# Altium PCB top_blank.PcbDoc
Units mm, origin at the board's own origin, x right, y up, seen from the top; angles counter-clockwise.
Board outline 222.25 x 157.48 mm, 2 copper layers (Top Layer, Bottom Layer); 45 components, 27 nets, 181 pads, 2 vias.
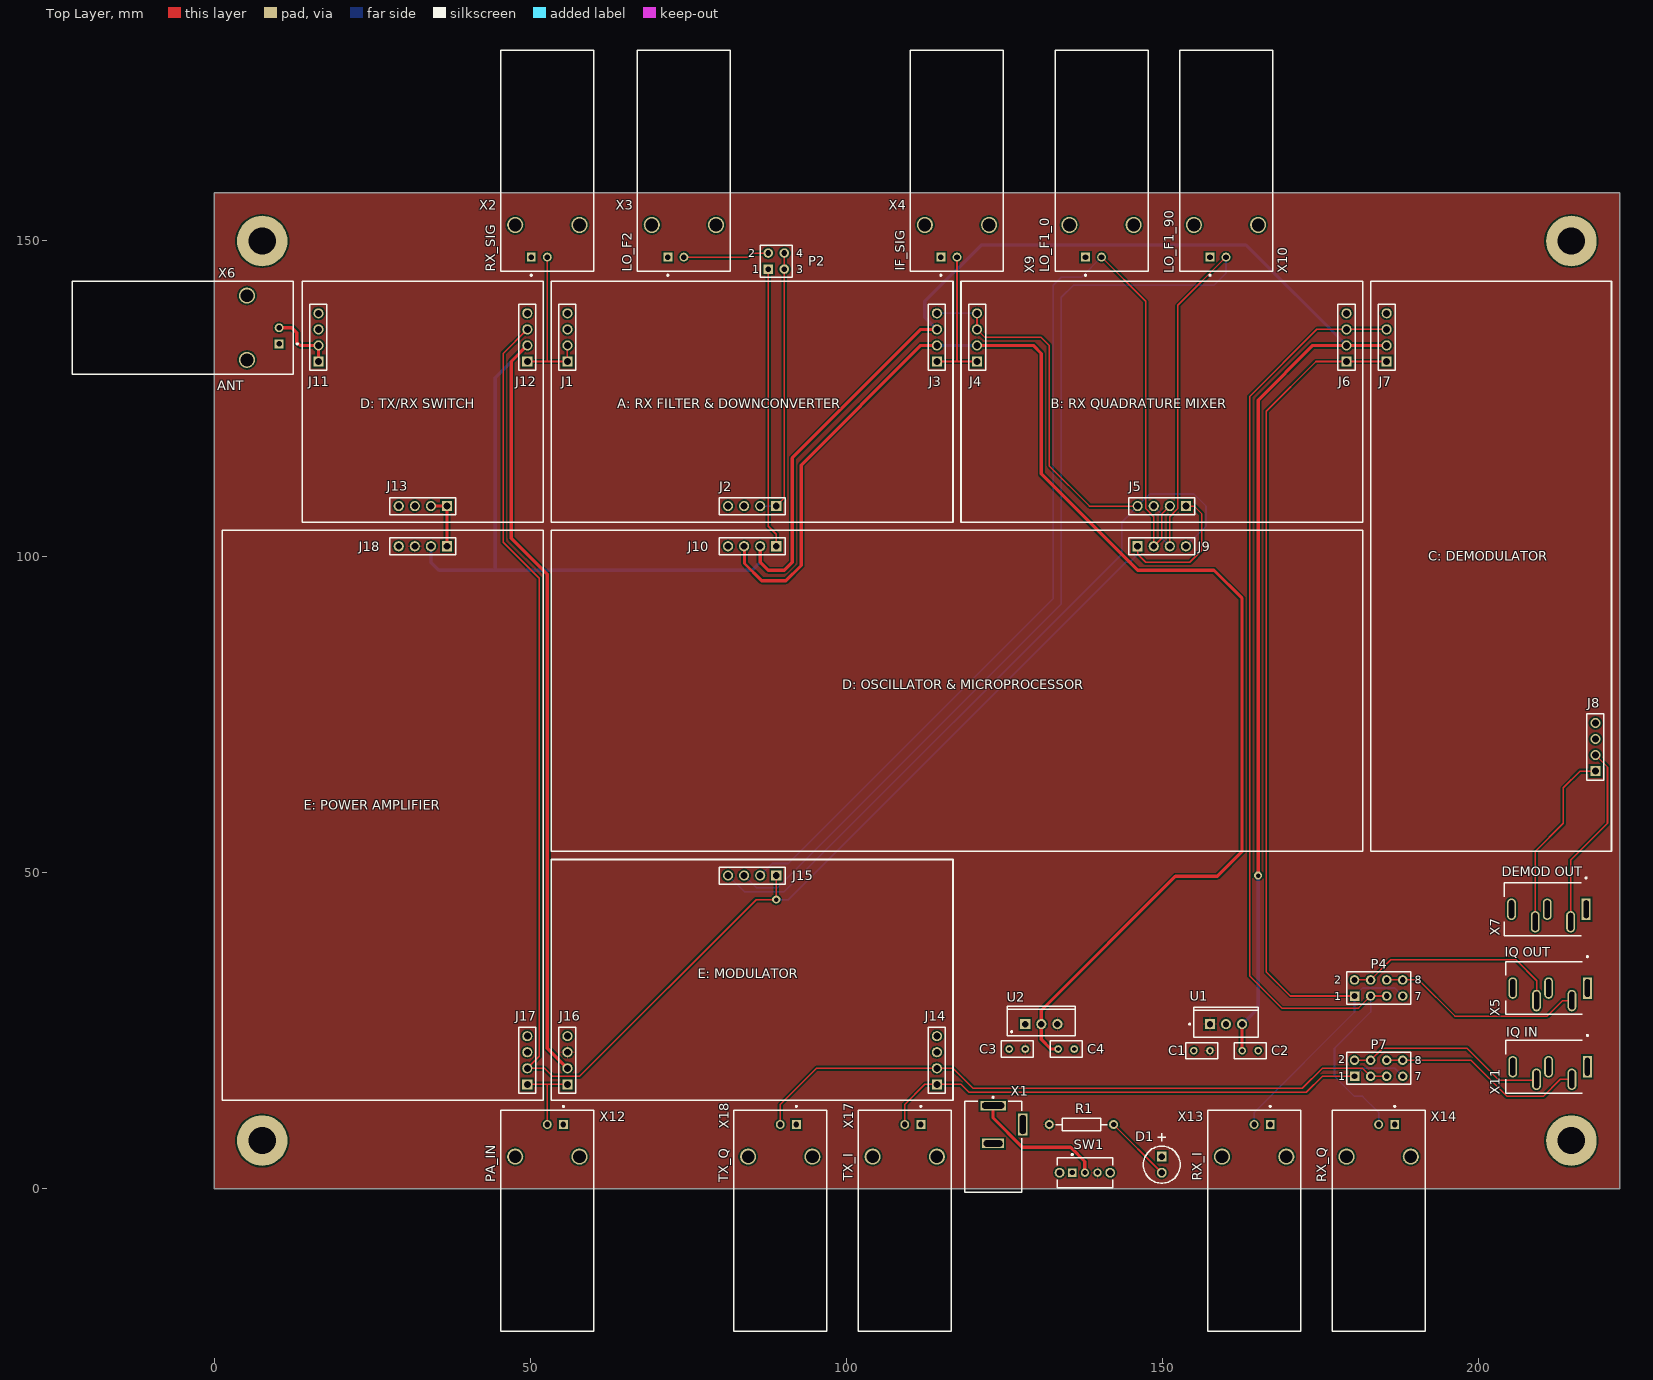
[diagram p0: Top Layer view]
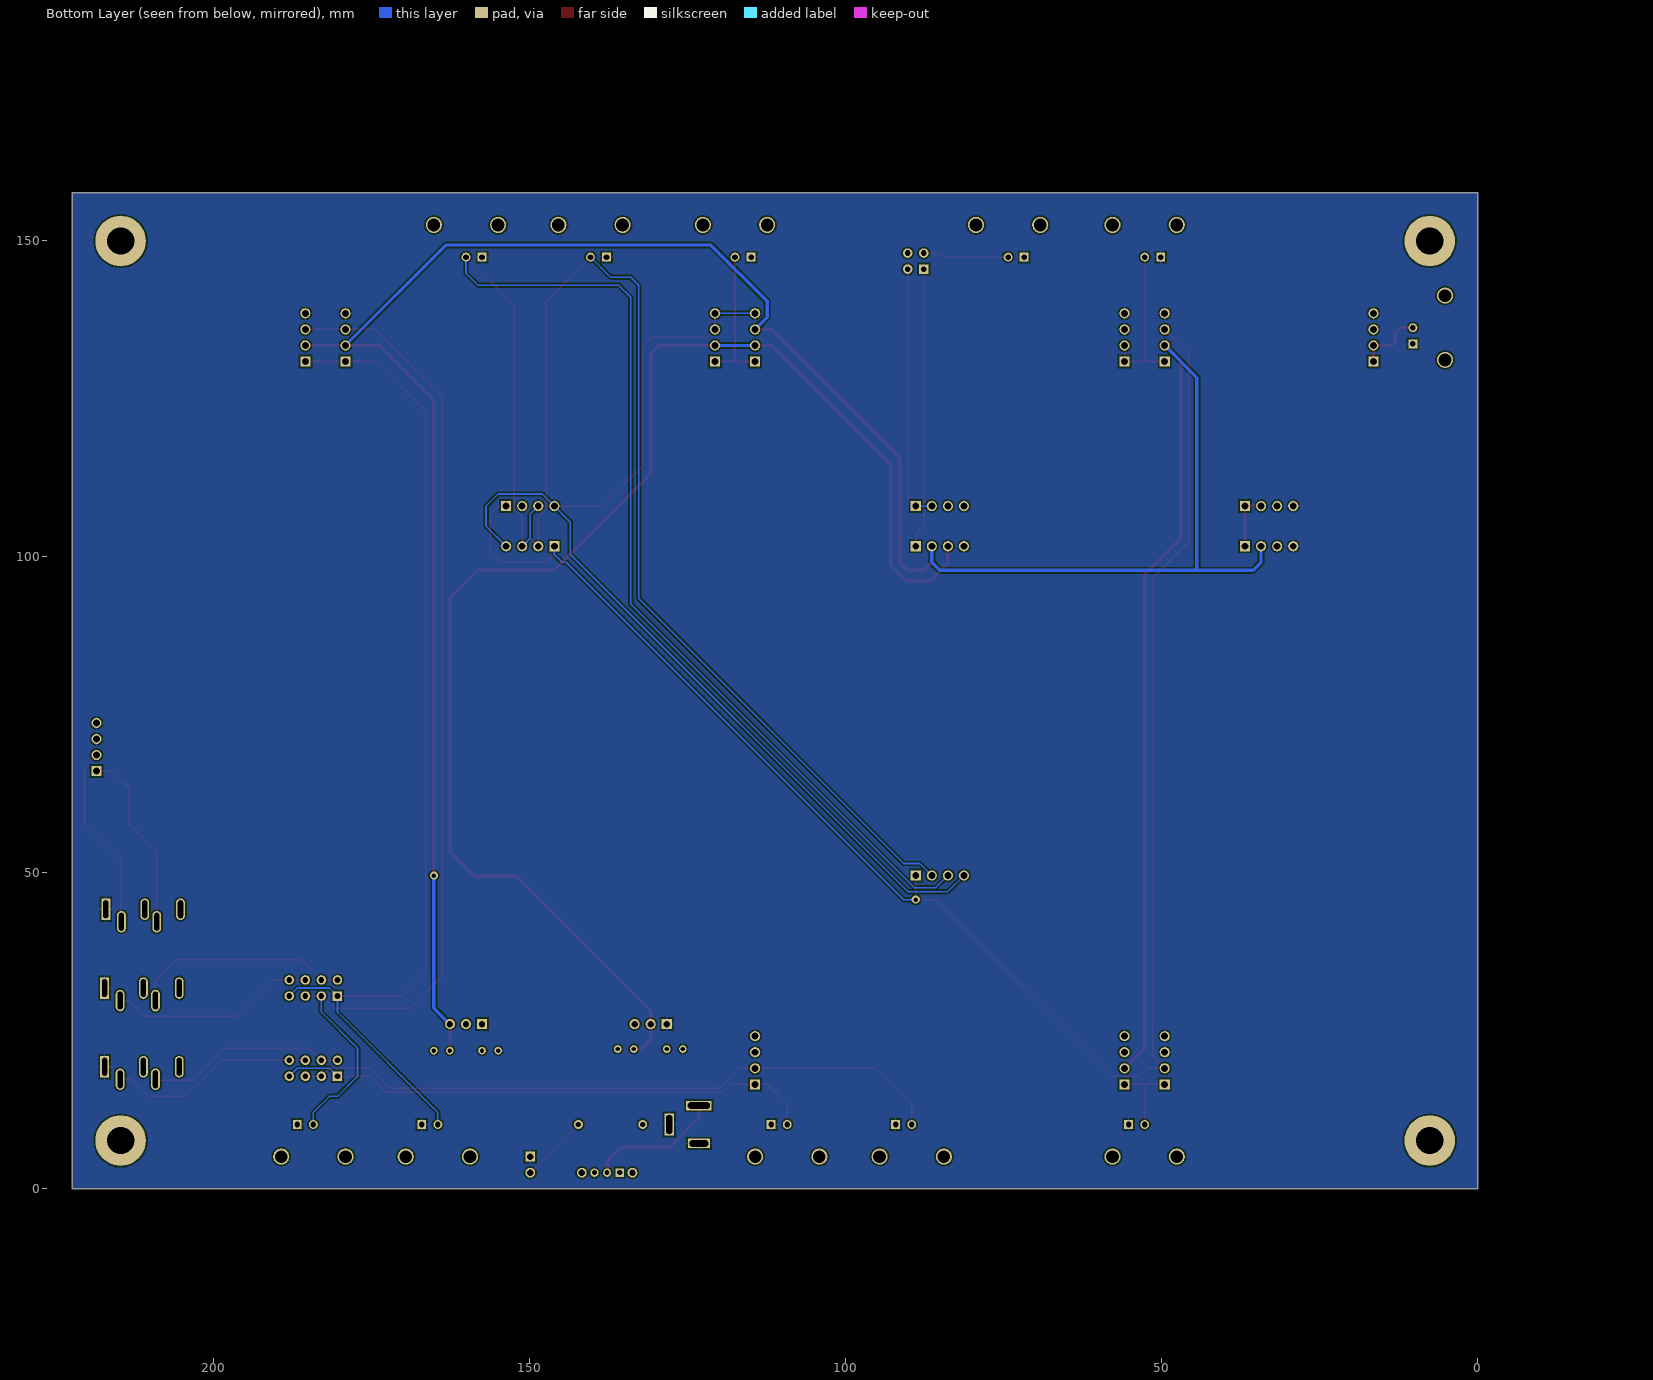
[diagram p1: Bottom Layer view, seen from below]
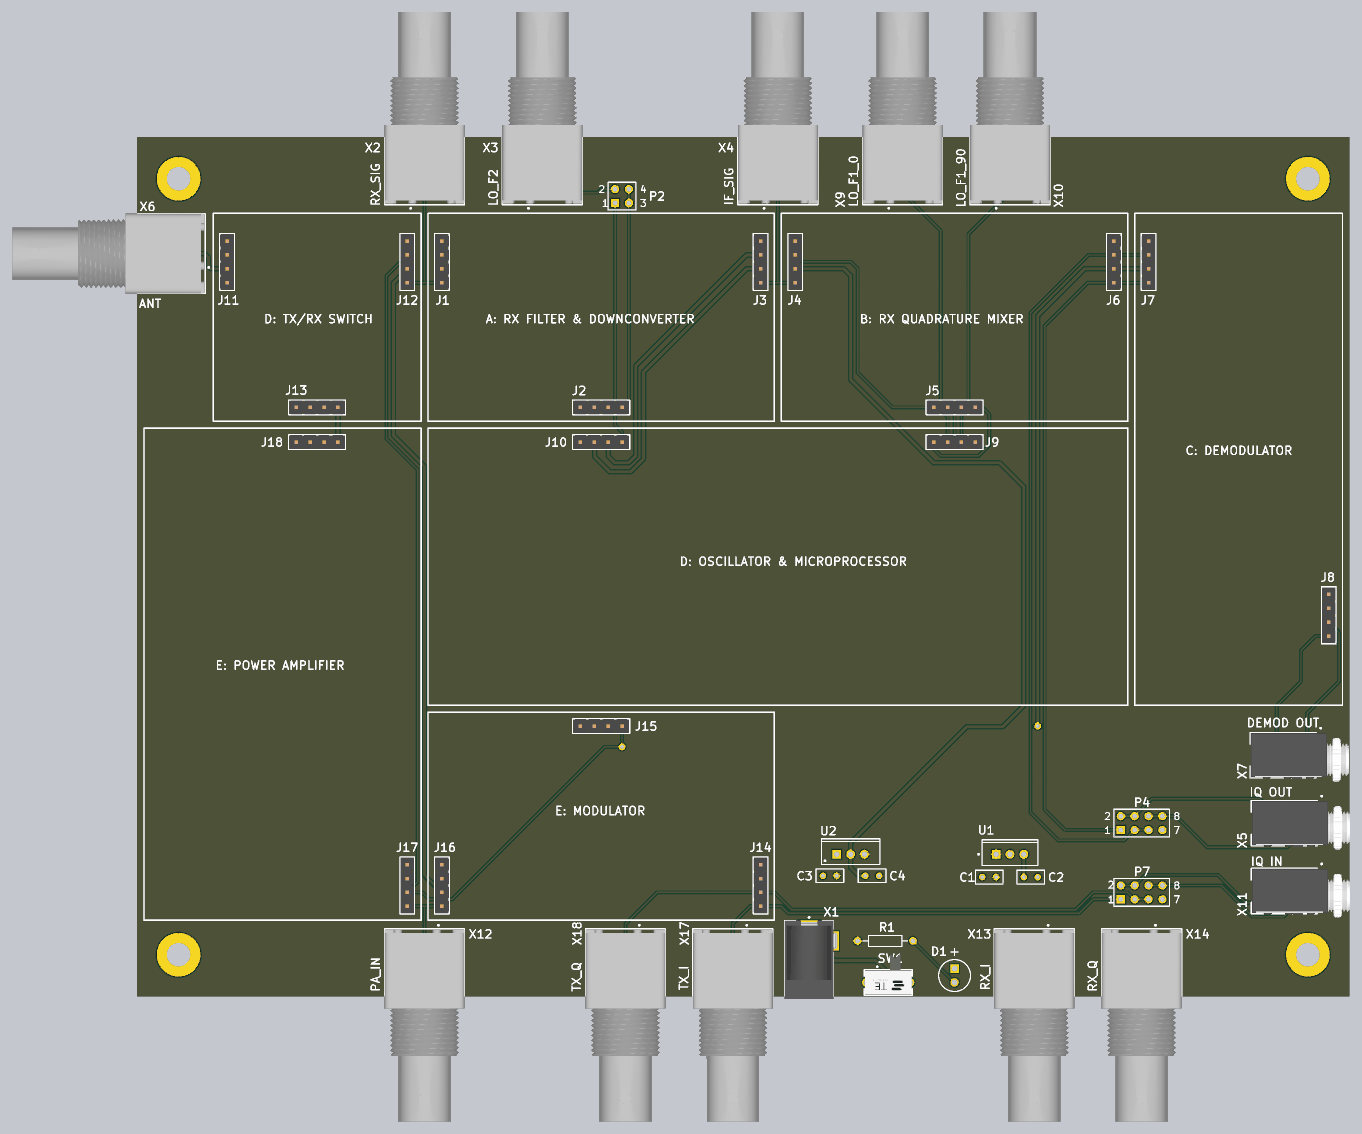
[diagram p2: 3D render of the assembled board from above, using the file's embedded part models]

## Layer stack, top to bottom
Top Solder: solder mask 0.0102, Solder Resist, Dk 3.5
Top Layer: signal copper 0.0356
Dielectric 1: dielectric 0.32, FR-4, Dk 4.8
Bottom Layer: signal copper 0.0356
Bottom Solder: solder mask 0.0102, Solder Resist, Dk 3.5

## Board outline
0,0 222.25,0 222.25,157.48 0,157.48

## Design rules (kind name [scope] priority, off if disabled: settings)
Clearance Clearance_1 [All] p1: gap=0.254 ignorepadtopadclearanceinfootprint=FALSE except(0: Arc-Hole Track-Hole SMDPad-Hole THPad-Hole Via-Hole Fill-Hole Poly-Hole Region-Hole Text-Hole)
Clearance [All] p2: gap=0.254 ignorepadtopadclearanceinfootprint=FALSE except(0: Arc-Hole Track-Hole SMDPad-Hole THPad-Hole Via-Hole Fill-Hole Poly-Hole Region-Hole Text-Hole)
HoleSize [All] p1: absolutevalues=TRUE maxlimit=3.5 minlimit=0.025 maxpercent=80.000 minpercent=20.000
PolygonConnect [All] p1: connectstyle=Relief reliefconductorwidth=0.254 reliefentries=4 polygonreliefangle="90 Angle" airgapwidth=0.254
RoutingVias [All] p1: holewidth=0.711 width=1.27 viastyle="Through Hole" minholewidth=0.711 minwidth=1.27 maxholewidth=0.711 maxwidth=1.27
SilkToSilkClearance [All] p1: silktosilkclearance=0.1
SilkToSolderMaskClearance [IsPad] p1: minsilkscreentomaskgap=0.2 clearancetoexposedcopper=TRUE
SolderMaskExpansion [All] p1: expansion=0.102 istentingtop=FALSE
Width Width_1 [(InNet('+3.3') OR InNet('+5') OR InNet('VCC') OR InNet('ANT') or InNet('PA_OUT') or InNet('VIN'))] p1: maxlimit=0.508 minlimit=0.508 preferedwidth=0.508
Width [All] p2: maxlimit=0.254 minlimit=0.254 preferedwidth=0.254
27 further rules are at their usual default settings.

## Classes and differential pairs
component class U_power_intg: C1 C2 C3 C4 U1 U2
component class U_switch_blank: J11 J12 J13
component class U_rxdown_blank: J1 J2 J3
component class U_qse_blank: J14 J15 J16
component class U_qsd_blank: J4 J5 J6
component class U_pa_blank: J17 J18
component class U_osc_blank: J9 J10
component class U_demod_blank: J7 J8
component class top_blank: D1 P2 P4 P7 R1 SW1 X1 X2 X3 X4 X5 X6 X7 X9 X10 X11 X12 X13 X14 X17 X18

## Components (designator, comment, footprint, x,y, rotation, side; value= is the part's Value field where it differs from the comment)
C1 "Cap" RAD-0.1 156.21,21.844 r180 top value=0.22uF
C2 "Cap" RAD-0.1 163.83,21.844 r0 top value=0.1uF
C3 "Cap Pol1" RAD-0.1 127,22.098 r180 top value=10uF
C4 "Cap" RAD-0.1 134.747,22.098 r0 top value=0.1uF
D1 "HLMP-3301" AVAG-HLMP-3301-2 149.86,5.08 r270 top
J1 "RF" 61300411121 55.88,134.62 r90 top
J2 "LO" 61300411121 85.09,107.95 r180 top
J3 "IF" 61300411121 114.3,134.62 r90 top
J4 "IF" 61300411121 120.65,134.62 r90 top
J5 "LO" 61300411121 149.86,107.95 r180 top
J6 "OUT" 61300411121 179.07,134.62 r90 top
J7 "IN" 61300411121 185.42,134.62 r90 top
J8 "IN" 61300411121 218.44,69.85 r90 top
J9 "LO_F1" 61300411121 149.86,101.6 r0 top
J10 "LO_F2" 61300411121 85.09,101.6 r180 top
J11 "ANT" 61300411121 16.51,134.62 r90 top
J12 "RX" 61300411121 49.53,134.62 r90 top
J13 "TX" 61300411121 33.02,107.95 r180 top
J14 "IN" 61300411121 114.3,20.32 r90 top
J15 "LO" 61300411121 85.09,49.53 r180 top
J16 "PA" 61300411121 55.88,20.32 r90 top
J17 "IN" 61300411121 49.53,20.32 r90 top
J18 "OUT" 61300411121 33.02,101.6 r180 top
P2 "Header 2X2" HDR2X2 87.63,145.415 r0 top
P4 "Header 4X2" HDR2X4 180.34,30.48 r0 top
P7 "Header 4X2" HDR2X4 180.34,17.78 r0 top
R1 "Res1" AXIAL-0.4 137.16,10.16 r180 top value=1k
SW1 "1825232-1" FP-1825232-1-MFG 137.7,2.54 r0 top
U1 "LM7805CT" FAIR-TO-220-3 160.02,26.035 r90 top
U2 "LM1117T-3.3" T03B 130.81,26.035 r0 top
X1 "PJ-002A" CUI-PJ-002A_V 123.19,10.16 r270 top
X2 "RX_SIG" TECO-1-1337543-0_V 52.705,152.4 r0 top
X3 "LO_F2" TECO-1-1337543-0_V 74.295,152.4 r0 top
X4 "IF_SIG" TECO-1-1337543-0_V 117.475,152.4 r0 top
X5 "IQ OUT" FP-35RAPC4BV4-MFG 213.36,31.75 r180 top
X6 "ANT" TECO-1-1337543-0_V 5.207,136.144 r90 top
X7 "DEMOD OUT" FP-35RAPC4BV4-MFG 213.157,44.209 r180 top
X9 "LO_F1_0" TECO-1-1337543-0_V 140.335,152.4 r0 top
X10 "LO_F1_90" TECO-1-1337543-0_V 160.02,152.4 r0 top
X11 "IQ IN" FP-35RAPC4BV4-MFG 213.36,19.304 r180 top
X12 "PA_IN" TECO-1-1337543-0_V 52.705,5.08 r180 top
X13 "RX_I" TECO-1-1337543-0_V 164.465,5.08 r180 top
X14 "RX_Q" TECO-1-1337543-0_V 184.15,5.08 r180 top
X17 "TX_I" TECO-1-1337543-0_V 109.22,5.08 r180 top
X18 "TX_Q" TECO-1-1337543-0_V 89.535,5.08 r180 top

## Footprints (in the part's own frame and the unit in brackets; to place one, negate y for a bottom-side part, rotate by r counter-clockwise, add the part's x,y. Pads: shape width x height; smd on the part's side, far side on the other; paste and mask are expansions set on the pad)
61300411121 [mm] "Pin Header, pitch 2.54 mm, THT, Vertical, single row, 4p"
  rect 1.6x1.6 hole 1.1: 1(-3.81,0)
  round 1.6 hole 1.1: 2(-1.27,0) 3(1.27,0) 4(3.81,0)
  silkscreen extent -5.23,-1.35 5.23,1.35, body extent -5.08,-1.27 5.08,1.27, height 8.57
AVAG-HLMP-3301-2 [mm] "THD, 2-Leads, Body Dia 5.85mm"
  rect 1.55x1.55 hole 1.05: 1(0,0)
  round 1.55 hole 1.05: 2(2.54,0)
  silkscreen extent -3.68,-2.92 4.19,2.92
AXIAL-0.4 [mm] "Axial Device, Thru-Hole; 2 Leads; 0.4 in Pin Spacing"
  round 1.4 hole 0.85: 1(-5.08,0) 2(5.08,0)
  silkscreen extent -4.06,-1.02 4.06,1.02
CUI-PJ-002A_V [mm] "THD, 3-Leads, Body 14.4x9mm, Height 11mm"
  rect 1.5x4 hole 1 slot 3.5 at 90 deg: 1(-3,0)
  rect 1.5x3.5 hole 1 slot 3 at 90 deg: 2(3,0)
  rect 3.5x1.5 hole 1 slot 3 at 0 deg: 3(0,4.7)
  silkscreen extent -4.42,-4.5 10.7,4.5, body extent -3.7,-4.5 10.7,4.9, height 11
FAIR-TO-220-3 [mm] "FM, 3-Leads, Body 10.2x4.7mm, Pitch 2.54mm"
  rect 1.6x1.6 hole 1: 1(0,2.54)
  round 1.6 hole 1: 2(0,0) 3(0,-2.54)
  silkscreen extent -2.04,-5.1 2.66,5.87, body extent -2.04,-5.1 2.66,5.1, height 18.95
FP-35RAPC4BV4-MFG [mm]
  rect 1.4x3.4 hole 2.8 slot 0.8 at 0 deg paste-1000 mask+0: 1(-3.81,0.013)
  rrect100% 1.4x3.4 hole 2.8 slot 0.8 at 0 deg paste-1000 mask+0: 2(-1.346,1.994) 3(2.337,0.013) 4(4.242,1.994) 5(8.001,0.013)
  silkscreen extent -3.93,-5.07 9.12,4.18, body extent -9.22,-4.28 9.22,4.28, height 0.25
FP-1825232-1-MFG [mm]
  rect 1.3x1.3 hole 0.8 paste-1000 mask+0: 1(-2,0)
  round 1.3 hole 0.8 paste-1000 mask+0: 2(0,0) 3(2,0)
  round 1.55 hole 1 paste-1000 mask+0: 4(-4,0) 5(4,0)
  silkscreen extent -4.4,-2.35 4.4,3, body extent -4.87,-5.45 4.87,2.45, height 0.25
HDR2X2 [mm] "Connector; Header; 2x2 Position"
  rect 1.5x1.5 hole 0.9: 1(0,0)
  round 1.5 hole 0.9: 2(0,2.54) 3(2.54,0) 4(2.54,2.54)
  silkscreen extent -1.27,-1.27 3.81,3.81
HDR2X4 [mm] "Connector; Header; 4x2 Position"
  rect 1.5x1.5 hole 0.9: 1(0,0)
  round 1.5 hole 0.9: 2(0,2.54) 3(2.54,0) 4(2.54,2.54) 5(5.08,0) 6(5.08,2.54) 7(7.62,0) 8(7.62,2.54)
  silkscreen extent -1.27,-1.27 8.89,3.81
RAD-0.1 [mm] "Radial Cap, Thru-Hole; 2 Leads; 0.1 in Pin Spacing"
  round 1.2 hole 0.7: 1(-1.27,0) 2(1.27,0)
  silkscreen extent -2.54,-1.27 2.54,1.27
T03B [mm] "TO, Thru-Hole, Vertical, Heatsink Mounted; 3 In-Line Leads; Pitch 2.54 mm"
  rect 1.6x1.6 hole 1: 1(-2.54,0)
  round 1.6 hole 1: 2(0,0) 3(2.54,0)
  silkscreen extent -5.35,-1.85 5.35,2.85, body extent -5.4,-1.9 5.4,2.9, height 19.8
TECO-1-1337543-0_V [mm] "SMD, 2-Leads, Body 34.9x14.7mm, Pitch 2.54mm"
  rect 1.4x1.4 hole 0.89: 1(-2.54,-5.08)
  round 1.4 hole 0.89: 2(0,-5.08)
  round 2.55 hole 2.01: MH1(-5.08,0) MH2(5.08,0)
  silkscreen extent -7.35,-8.07 7.35,27.6, body extent -7.35,-7.1 7.35,28.05, height 15.8

## Part data
C1 C2 C4: "Capacitor", LatestRevisionDate=17-Jul-2002, LatestRevisionNote="Re-released for DXP Platform.", PackageDescription="Radial Cap, Thru-Hole; 2 Leads; 0.3 in Pin Spacing", PackageReference=RAD-0.3, Published=8-Jun-2000, Publisher="Altium Limited"
C3: "Polarized Capacitor (Radial)", LatestRevisionDate=17-Jul-2002, LatestRevisionNote="Re-released for DXP Platform.", PackageDescription="Polarized Capacitor (Radial); 2 Leads", PackageReference=RB7.6-15, Published=8-Jun-2000, Publisher="Altium Limited"
D1: library part CMP-2000-06411-1, "T-1 3/4 (5 mm) Diffused LED Lamp, 1.9 V, -40 to 100 degC, 2-Pin THD, RoHS, Bulk", Emitting color=Red, Forward Current=25mA, Forward Voltage=2.4V, Manufacturer=Avago, Operating Temp Range=-40Cto100C, Operating Temperature Classification=Industrial, Package Description="2-Pin Through Hole LED, Dia 5.85 mm", Package Type=T-13/4, Power Dissipation=85W, Reverse Voltage=5V, Test Current (It)=10mA, Chip Material=GaP, Datasheet URL=http://www.avagotech.com/docs/AV02-1558EN, Datasheet Version=03/2015, DELETED=Compliant, Dominant Wave Length=626nm, High Brightness=No, Lens Dimensions=5.08x5.08x8.3mm, Lens Type=ColoredDiffused, Lum Intensity=5.4mcd, Luminous Intensity=5.4mcd, Main Category=StandardLED, Manufacturer URL=http://www.avagotech.com/, Mounting=ThroughHole, Mounting Technology=ThroughHole, Number of  Elements=1, Package Reference=HLMP-3301, Packaging=TapeandReel, Peak Wavelength=635nm, Pin Count=2, Product Depth (mm)=6.1mm, Product Height (mm)=9.19mm, Product Length (mm)=6.1mm, Rad Hardened=No, Shape Type=Circular, Type=Uni-Color, Viewing Angle=60deg
J1 J2 J3 J4 J5 J6 J7 J8 J9 J10 J11 J12 J13 J14 J15 J16 J17 J18: library part CMP-1502-01064-1, "THT Vertical Pin Header WR-PHD, Pitch 2.54 mm, Single Row, 4 pins", Contact Resistance=20mOhm, Manufacturer="Wurth Elektronik", Operating Temperature=-40to105degC, Package Reference=61300411121, Rated Current=3A, Withstanding Voltage=500VAC, Working Voltage=250VAC, Datasheet URL=https://katalog.we-online.de/em/datasheet/6130xx11121.pdf, Gender=Male, Manufacturer URL=http://www.we-online.de, Mounting Technology=THT, Orientation=Vertical, Packaging=Bag, Part Number=61300411121, Pin Number=4, Pitch=2.54mm, Publisher=WurthElektronik, Row Number=Single
P2: "Header, 2-Pin, Dual row", LatestRevisionDate=17-Jul-2002, LatestRevisionNote="Re-released for DXP Platform.", Publisher="Altium Limited"
P4 P7: "Header, 4-Pin, Dual row", LatestRevisionDate=17-Jul-2002, LatestRevisionNote="Re-released for DXP Platform.", Publisher="Altium Limited"
R1: "Resistor", LatestRevisionDate=17-Jul-2002, LatestRevisionNote="Re-released for DXP Platform.", PackageDescription="Axial Device, Thru-Hole; 2 Leads; 0.3 in Pin Spacing", PackageReference=AXIAL-0.3, Published=8-Jun-2000, Publisher="Altium Limited"
SW1: library part CMP-03405-000001-1, "SWITCH SLIDE SPDT 200MA 30V", Contact Current Rating=0.2A, Contact Resistance=20mΩ, Manufacturer="TE Connectivity", Operating Force=200gf, Temperature="-20°C to +70°C", Temperature Range High=+70°C, Temperature Range Low=-20°C, Voltage Rating Dc=30V, Automotive=No, Category=Switch, ComponentLink2Description=Datasheet, ComponentLink2URL=https://www.te.com/commerce/DocumentDelivery/DDEController?Action=showdoc&DocId=Customer+Drawing%7F1825232%7FB2%7Fpdf%7FEnglish%7FENG_CD_1825232_B2.pdf%7F1825232-1, Device Class L1=Electromechanical, Device Class L2=Switches, Device Class L3="Slide Switches", Digikey Description="SWITCH SLIDE SPDT 200MA 30V", Electromechanical Life=10000Cycles, Height=3.7mm, Lead Free=Yes, Manufacturer Part Number=1825232-1, Mount="Through Hole", Mouser Description="Slide Switches SLIDE SWITCH SPDT Right Angle", Octopart=https://octopart.com/1825232-1-te+connectivity-45209882, Package=1825232-1, RoHS=TRUE, Throw Configuration=SPDT
U1: library part CMP-2000-04938-1, "Positive Voltage Regulator, 5 V, 1 A, -40 to 125 degC, 3-Pin TO-220, RoHS, Tube", Manufacturer=FairchildSemiconductor, Maximum Input Voltage=35V, Maximum Output Current=2.2(Typ)A, Maximum Quiescent Current=8mA, Operating Temperature=-40to125degC, Output Voltage=5V, Package=3TO-220AB, Package Description="3-Pin Through Hole Device, Body 10 x 4.5 mm, Pitch 2.54 mm", Package Reference=TO-220, Typical Dropout Voltage @ Current=2@1AV, Accuracy=±4%, Category=LinearRegulator, Datasheet URL=https://datasheet.ciiva.com/26904/lm7805ct-26904988.pdf, Datasheet Version=Aug-12, Line Regulation=100mV, Load Regulation=100mV, Manufacturer URL=https://www.fairchildsemi.com/, Mounting=ThroughHole, Number of Outputs=1, Output Type=Fixed, Package URL=https://www.fairchildsemi.com/package-drawings/TO/TO220B03.pdf, Packaging=Rail/Tube, Polarity=Positive, Rad Hard=No, Type=Linear
U2: library part CMP-0062-02490-2, "800mA Low-Dropout Linear Regulator, 3-pin TO-220", Manufacturer="National Semiconductor", PackageTopMarking=NSUZXYTTE#*LM1117T*3.3, PowerWise=N, ComponentLink1Description="LM1117 Datasheet", ComponentLink1URL=http://www.national.com/ds/LM/LM1117.pdf, ComponentLink2Description="LM1117 Web Page", ComponentLink2URL=http://www.national.com/pf/LM/LM1117.html, ComponentLink3Description="T03B Package Page", ComponentLink3URL=http://www.national.com/packaging/folders/t03b.html, CompType="LDO IC", DatasheetVersion=Apr-2006, PackageDescription="TO-220, Molded, 3 Lead, Straight", PackageReference=T03B, PackageVersion="revL, Jan-1992", PinCount=3, RevisionNote="Component URLs added", RoHS=N
X1: library part CMP-2000-06895-1, "Through Hole Right Angle DC Power Jack, 2.5 A, 2 mm Center Pin, 3 Position, -25 to 85 degC, RoHS, Bulk", Current Rating=2.5A, Flammability Rating=UL94V-0, Insulation Resistance=50MOhms, Manufacturer=CUIInc., Operating Temperature Range=-25Cto+85C, Package Description="3-Pin Through Hole Device, Body 14.4 x 9 mm, Height 11 mm", Voltage Rating=24V, Brand=CUI, Connector Type=DCPowerJack, Contact Gender=Male, Contact Material=Copper, Contact Plating=Nickel, Datasheet URL=http://www.cui.com/product/resource/pj-002a.pdf, Datasheet Version="Rev. 1.03, 04/2016", Factory Pack Quantity=500, Housing Material=PolybutyleneTerephthalate(PBT), Inside Contact Diameter=2mm, Manufacturer URL=http://www.cui.com/, Mounting Angle=Right, Mounting Style=ThroughHole, Mounting Technology=ThroughHole, Outside Contact Diameter=6.5mm, Package Reference=PJ-002A, Product=Jacks, Product Category=DCPowerConnectors, RoHS=True, Termination Style=ThroughHole
X2 X3 X4 X6 X9 X10 X12 X13 X14 X17 X18: library part CMP-2000-05853-1, "Female Connector, Pitch 2.54 mm, 1 x 2 Position, Height 15.8 mm, Tail Length 3.8 mm,  / -55 to 85 degC, RoHS, Bulk", Frequency Max=4GHz, Manufacturer="TE Connectivity", Package Description="Female Connector, Pitch 2.54 mm, 1 x 2 Position, Height 15.8 mm, Tail Length 3.8 mm", Package Reference=1-1337543-0, Coaxial Cable Types=-, Coaxial Termination=Solder, Connector Body Style=RightAngleJack, Connector Mounting=PCBMount, Connector Type=BNCCoaxial, Contact Material=Brass, Contact Plating=GoldPlatedContacts, Datasheet URL=http://www.te.com/commerce/DocumentDelivery/DDEController?Action=showdoc&DocId=Customer+Drawing%7F1337543%7FG%7Fpdf%7FEnglish%7FENG_CD_1337543_G.pdf%7F1-1337543-0, Datasheet Version="Rev. G, 12/2012", Impedance=50ohm, Manufacturer URL=http://www.te.com/, Mounting Technology=ThroughHole, Product Range=-, SVHC=ToBeAdvised
X5 X7 X11: library part CMP-47983-000001-1, "CONN JACK STEREO 3.5MM R/A", Manufacturer=Switchcraft, Manufacturer Part Number=35RAPC4BV4, Automotive=No, Category=Conn, ComponentLink2Description=Datasheet, ComponentLink2URL=http://www.switchcraft.com/Drawings/35rapc__v4_cd.pdf, Conn Orientation="Right Angle", Contact Material=Silver, Device Class L1=Connectors, Device Class L2="Audio / Video Connectors", Device Class L3=unset, Digikey Description="CONN JACK STEREO 3.5MM R/A", Height=0.495inch, Lead Free=Yes, Mouser Description="Phone Connectors 3.5MM VERT STEREO JK", Number Of Contacts=5, Obsolete Part=true, Octopart=https://octopart.com/35rapc4bv4-switchcraft-223606, Package=35RAPC4BV4, RoHS=TRUE

## Free pads (board coordinates)
  round 8 hole 4.318 unplated: 2(214.63,7.62) 3(7.62,7.62) 4(7.62,149.86) 5(214.63,149.86)

## Via types
v1: diameter 1.27, hole 0.711, Top Layer to Bottom Layer, 2 vias

## Nets (pads, with @x,y where several pads share a name; then routed paths per layer and width w, separated by ;. In a path a pad name is that pad's centre, name@x,y a point inside that pad or via, vN(x,y) a via of type N, cw(c..) or ccw(c..) an arc to the next point about the centre after c; other vN are vias at no path point)
+3.3: C4.1 J3.2 J4.2 J10.3 U2.2 | length 225
  Top Layer w0.508: J10.3 83.883,101.536 83.883,98.87 86.614,96.139 90.424,96.139 92.837,98.552 92.837,114.427 111.76,133.35 J3.2 ; J4.2 129.54,133.35 130.81,132.08 130.81,113.03 146.05,97.79 158.115,97.79 162.56,93.345 162.56,53.34 158.623,49.403 152.019,49.403 130.81,28.194 U2.2 130.81,23.622 132.334,22.098 C4.1
  Bottom Layer w0.508: J3.2 J4.2
+5: C2.1 J3.3 J6.2 J7.2 J10.2 J12.2 J16.2 J18.2 U1.3 | length 481.3
  Top Layer w0.508: J12.2 46.99,130.81 46.99,102.87 52.705,97.155 52.705,22.225 J16.2 ; J10.2 86.36,99.06 87.63,97.79 90.17,97.79 91.44,99.06 91.44,115.57 111.76,135.89 J3.3 ; C2.1 U1.3 ; v1(165.1,49.53) 165.1,124.714 173.736,133.35 J6.2 J7.2
  Bottom Layer w0.508: J18.2 34.29,99.06 35.56,97.79 44.45,97.79 ; J12.2 44.45,128.27 44.45,97.79 ; J10.2 86.36,99.06 85.09,97.79 44.45,97.79 ; J3.3 112.395,137.795 112.395,140.335 121.285,149.225 163.195,149.225 J6.2 ; U1.3 165.1,28.575 v1(165.1,49.53)
ANT: J11.1 J11.2 X6.2 | length 10.8
  Top Layer w0.508: X6.2 12.319,136.144 13.081,135.382 13.081,133.858 13.589,133.35 J11.2 J11.1
GND: C1.2 C2.2 C3.2 C4.2 D1.1 J1.3 J1.4 J2.3 J2.4 J3.4 J4.3 J4.4 J5.4 J6.4 J7.4 J8.3 J8.4 J9.4 J10.4 J11.3 J11.4 J12.4 J13.3 J13.4 J14.3 J14.4 J15.4 J16.4 J17.3 J17.4 J18.4 U1.2 U2.1 X1.2 X1.3 X2.1 X3.1 X4.1 X5.1 X6.1 X7.1 X9.1 X10.1 X11.1 X12.1 X13.1 X14.1 X17.1 X18.1 | length 171.1
  Top Layer w0.254: J4.4 J4.3 121.92,134.62 130.81,134.62 132.08,133.35 132.08,114.3 138.43,107.95 J5.4
  Bottom Layer w0.254: J15.4 83.82,46.99 90.17,46.99 143.51,100.33 143.51,105.41 J5.4 147.955,109.855 154.94,109.855 156.845,107.95 156.845,104.775 J9.4 ; J3.4 J4.4
IF_SIG: J3.1 J4.1 X4.2 | length 22.9
  Top Layer w0.254: J3.1 117.475,130.81 ; X4.2 117.475,130.81 ; J4.1 117.475,130.81
LO_F1_0: J5.2 J9.2 J15.2 X9.2 | length 180
  Top Layer w0.254: X9.2 147.32,140.335 147.32,139.7 147.32,107.55 148.59,106.28 J9.2 149.86,102.87 149.86,106.68 J5.2
  Bottom Layer w0.254: J15.2 88.265,51.435 90.805,51.435 132.715,93.345 132.715,142.875 133.985,144.145 137.16,144.145 X9.2
LO_F1_90: J5.3 J9.3 J15.3 X10.2 | length 205.2
  Top Layer w0.254: J9.3 151.13,106.28 152.4,107.55 152.4,139.065 152.4,139.7 X10.2
  Bottom Layer w0.254: J15.3 85.725,47.625 89.134,47.625 133.985,92.476 133.985,140.97 135.89,142.875 158.115,142.875 160.02,144.78 X10.2 ; J5.3@148.59,107.763 J5.3 149.86,106.68 149.86,102.87 J9.3
LO_F2: P2.2 X3.2 | length 13.6
  Top Layer w0.254: X3.2 84.455,147.32 85.09,147.955 P2.2
LO_F2_OSC: J10.1 P2.1 | length 44.3
  Top Layer w0.254: P2.1 87.63,104.775 88.9,103.505 J10.1
LO_F2_RXD: J2.1 J2.2 P2.3 P2.4 | length 43.1
  Top Layer w0.254: J2.1 90.17,109.22 P2.3 P2.4
  Bottom Layer w0.254: J2.2 J2.1
NetD1_2: D1.2 R1.1 | length 10.8
  Top Layer w0.254: R1.1 D1.2
NetJ8_1: J8.1 X7.4 | length 28.4
  Top Layer w0.254: X7.4@208.915,43.04 208.915,53.34 213.36,57.785 213.36,63.395 216.005,66.04 J8.1
NetJ8_2: J8.2 X7.2 | length 29.6
  Top Layer w0.254: X7.2 214.503,51.943 220.345,57.785 220.345,66.675 J8.2
NetJ14_1: J14.1 P7.1 P7.7 X17.2 | length 85.9
  Top Layer w0.254: X17.2 109.22,13.335 112.395,16.51 J14.1 118.11,16.51 119.38,15.24 172.72,15.24 175.26,17.78 P7.1
  Bottom Layer w0.254: P7.1 181.61,19.05 186.69,19.05 P7.7
NetJ14_2: J14.2 P7.3 P7.5 X18.2 | length 104.6
  Top Layer w0.254: X18.2 89.535,13.335 95.25,19.05 J14.2 116.84,19.05 120.015,15.875 172.085,15.875 175.26,19.05 181.61,19.05 P7.3 P7.5
NetP4_2: P4.2 P4.4 X5.4 | length 34.7
  Top Layer w0.254: P4.2 P4.4 186.055,36.195 205.867,36.195 209.169,32.893 209.169,29.807 X5.4
NetP4_6: P4.6 P4.8 X5.2 | length 32.7
  Top Layer w0.254: P4.6 P4.8 190.5,33.02 196.215,27.305 210.82,27.305 213.271,29.756 X5.2
NetP7_2: P7.2 P7.4 X11.4 | length 31.7
  Top Layer w0.254: P7.2 P7.4 184.785,22.225 198.12,22.225 203.2,17.145 208.953,17.145 X11.4
NetP7_6: P7.6 P7.8 X11.2 | length 32.8
  Top Layer w0.254: P7.6 P7.8 198.755,20.32 204.47,14.605 210.185,14.605 212.89,17.31 X11.2
PA_IN: J16.1 J17.1 X12.2 | length 13.7
  Top Layer w0.254: J17.1 52.705,16.51 ; X12.2 52.705,16.51 ; J16.1@55.207,15.837 J16.1 52.705,16.51
PA_OUT: J13.1 J13.2 J18.1 | length 8.9
  Top Layer w0.508: J13.2 J13.1 36.83,105.41 J18.1
RX_I: J6.1 J7.1 P4.1 P4.7 X13.2 | length 162.1
  Top Layer w0.254: P4.1 170.18,30.48 166.37,34.29 166.37,122.936 174.244,130.81 J6.1 J7.1
  Bottom Layer w0.254: X13.2 164.465,12.065 180.34,27.94 P4.1 181.61,31.75 186.69,31.75 P4.7
RX_Q: J6.3 J7.3 P4.3 P4.5 X14.2 | length 168.5
  Top Layer w0.254: P4.5 P4.3 180.975,28.575 168.853,28.575 163.773,33.655 163.773,125.281 174.382,135.89 J6.3 J7.3
  Bottom Layer w0.254: P4.3 182.88,27.94 177.165,22.225 177.165,17.78 180.34,14.605 181.61,14.605 184.15,12.065 X14.2
RX_SIG: J1.1 J1.2 J12.1 X2.2 | length 25.4
  Top Layer w0.254: J12.1 52.705,130.81 ; X2.2 52.705,130.81 ; J1.2 J1.1 52.705,130.81
TXEN: J5.1 J9.1 J12.3 J15.1 J17.2 | length 280
  Top Layer w0.254: J12.3 45.72,132.08 45.72,102.235 51.435,96.52 51.435,20.955 J17.2 52.252,19.05 53.522,17.78 57.785,17.78 85.725,45.72 v1(88.9,45.72) J15.1 ; J9.1 146.05,100.33 147.32,99.06 154.305,99.06 156.21,100.965 156.21,106.68 154.94,107.95 J5.1
  Bottom Layer w0.254: v1(88.9,45.72) 90.805,45.72 144.145,99.06 144.78,99.06 146.05,100.33 J9.1 J9.1@145.653,101.203
VCC: C1.1 C3.1 J16.3 J18.3 R1.2 SW1.3 U1.1 U2.3
VIN: SW1.2 X1.1 | length 21.1
  Top Layer w0.508: X1.1 123.19,11.184 127.824,6.55 135.436,6.55 137.668,4.318 137.668,2.572 SW1.2
pads on no net: SW1.1 SW1.4 SW1.5 X2.MH1 X2.MH2 X3.MH1 X3.MH2 X4.MH1 X4.MH2 X5.3 X5.5 X6.MH1 X6.MH2 X7.3 X7.5 X9.MH1 X9.MH2 X10.MH1 X10.MH2 X11.3 X11.5 X12.MH1 X12.MH2 X13.MH1 X13.MH2 X14.MH1 X14.MH2 X17.MH1 X17.MH2 X18.MH1 X18.MH2

## Polygon pours and split planes (outlines as drawn)
VCC on Top Layer "VCC_L01_P003" (solid, pour order 3): 0,0 222.25,0 222.25,157.48 0,157.48
GND on Bottom Layer "GND_L02_P005" (solid, pour order 5): 0,0 222.25,0 222.25,157.48 0,157.48

## Silkscreen, mask and mechanical layers (free items; w line width, h text height)
Top Overlay:
  lines w0.254: 1.27,13.97 1.27,104.14 52.07,104.14 52.07,13.97 1.27,13.97 ; 13.97,105.41 13.97,143.51 52.07,143.51 52.07,105.41 13.97,105.41 ; 53.34,13.97 53.34,52.07 116.84,52.07 116.84,13.97 53.34,13.97 ; 53.34,53.34 53.34,104.14 181.61,104.14 181.61,53.34 53.34,53.34 ; 53.34,105.41 53.34,143.51 116.84,143.51 116.84,105.41 53.34,105.41 ; 118.11,105.41 118.11,143.51 181.61,143.51 181.61,105.41 118.11,105.41 ; 182.88,53.34 182.88,143.51 220.98,143.51 220.98,53.34 182.88,53.34
  text "D: TX/RX SWITCH" at 23.114,123.444 h1.52
  text "A: RX FILTER & DOWNCONVERTER" at 63.754,123.444 h1.52
  text "B: RX QUADRATURE MIXER" at 132.334,123.444 h1.52
  text "C: DEMODULATOR" at 192.024,99.314 h1.52
  text "D: OSCILLATOR & MICROPROCESSOR" at 99.314,78.994 h1.52
  text "E: POWER AMPLIFIER" at 14.224,59.944 h1.52
  text "E: MODULATOR" at 76.454,33.274 h1.52
Mechanical 1:
  lines w0.254: 1.27,13.97 52.07,13.97 52.07,104.14 1.27,104.14 1.27,13.97 ; 13.97,105.41 52.07,105.41 52.07,143.51 13.97,143.51 13.97,105.41 ; 53.34,13.97 53.34,52.07 116.84,52.07 116.84,13.97 53.34,13.97 ; 53.34,53.34 53.34,104.14 181.61,104.14 181.61,53.34 53.34,53.34 ; 53.34,105.41 116.84,105.41 116.84,143.51 53.34,143.51 53.34,105.41 ; 118.11,105.41 181.61,105.41 181.61,143.51 118.11,143.51 118.11,105.41 ; 182.88,53.34 220.98,53.34 220.98,143.51 182.88,143.51 182.88,53.34
Mechanical 13:
  the board outline again, w0.5

## Dimensions
0,-6.35 to 222.25,0 on Mechanical 15
222.885,0 to 222.25,157.48 on Mechanical 15

## Text inside footprints (layer, text, board x,y; h text height)
P2: Top Overlay "4" at 92.075,147.32 h1.27; Top Overlay "2" at 84.455,147.32 h1.27; Top Overlay "1" at 85.09,144.78 h1.27; Top Overlay "3" at 92.075,144.78 h1.27
P4: Top Overlay "8" at 189.865,32.385 h1.27; Top Overlay "7" at 189.865,29.845 h1.27; Top Overlay "1" at 177.165,29.845 h1.27; Top Overlay "2" at 177.165,32.385 h1.27
P7: Top Overlay "2" at 177.8,19.812 h1.27; Top Overlay "1" at 177.8,17.145 h1.27; Top Overlay "7" at 189.865,17.145 h1.27; Top Overlay "8" at 189.865,19.685 h1.27